# Altium PCB PCB1.PcbDoc
Units mil, origin at the board's own origin, x right, y up, seen from the top; angles counter-clockwise.
Board outline 3898.32 x 3898.32 mil, 2 copper layers (Top Layer, Bottom Layer); 61 components, 48 nets, 233 pads, 56 vias.
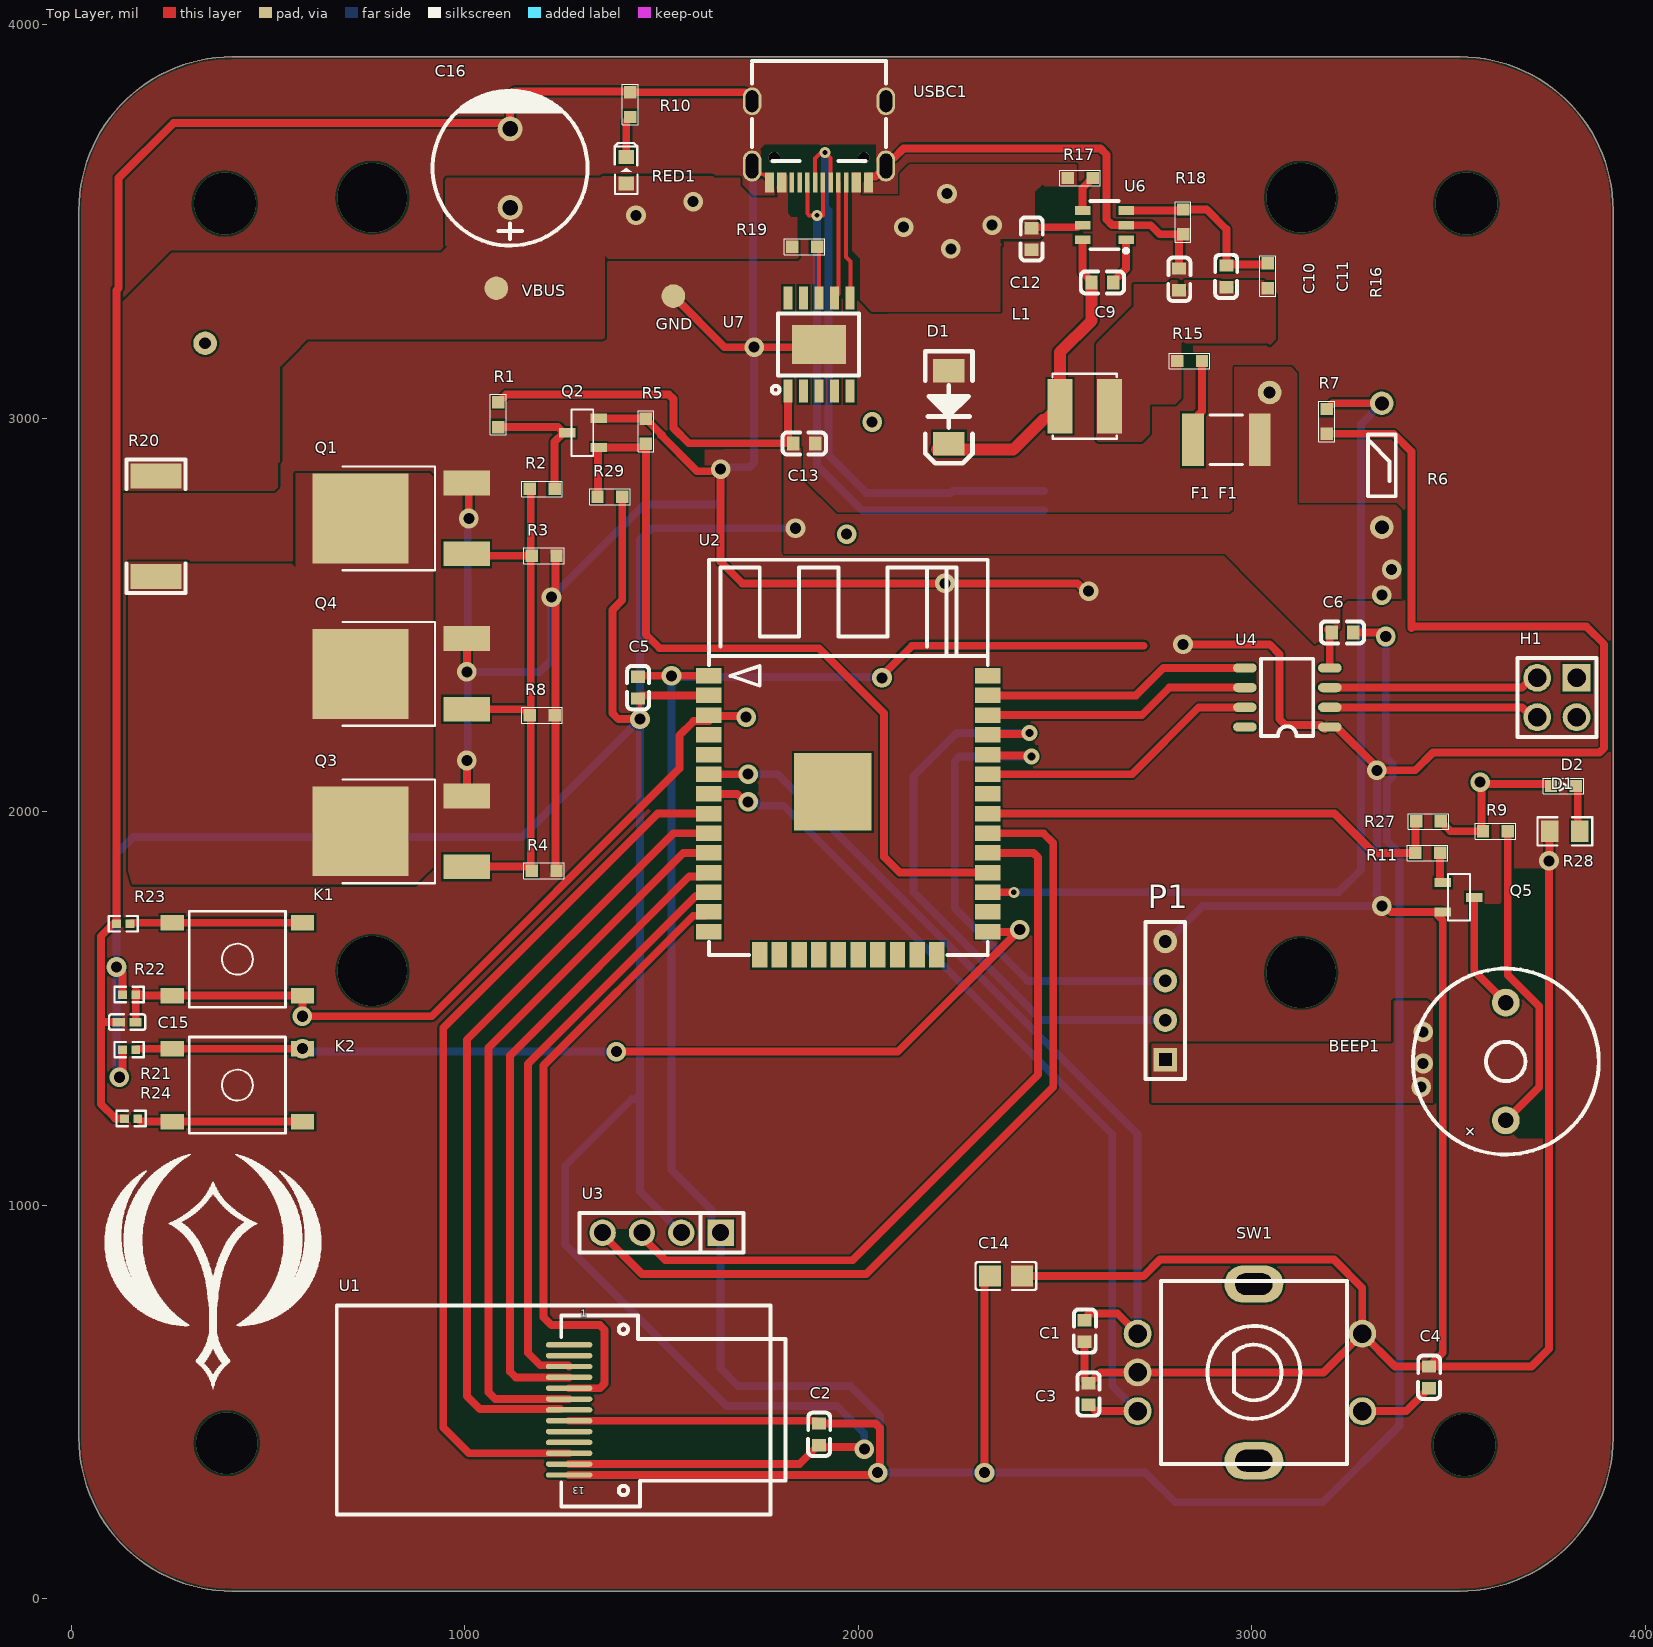
[diagram p0: Top Layer view]
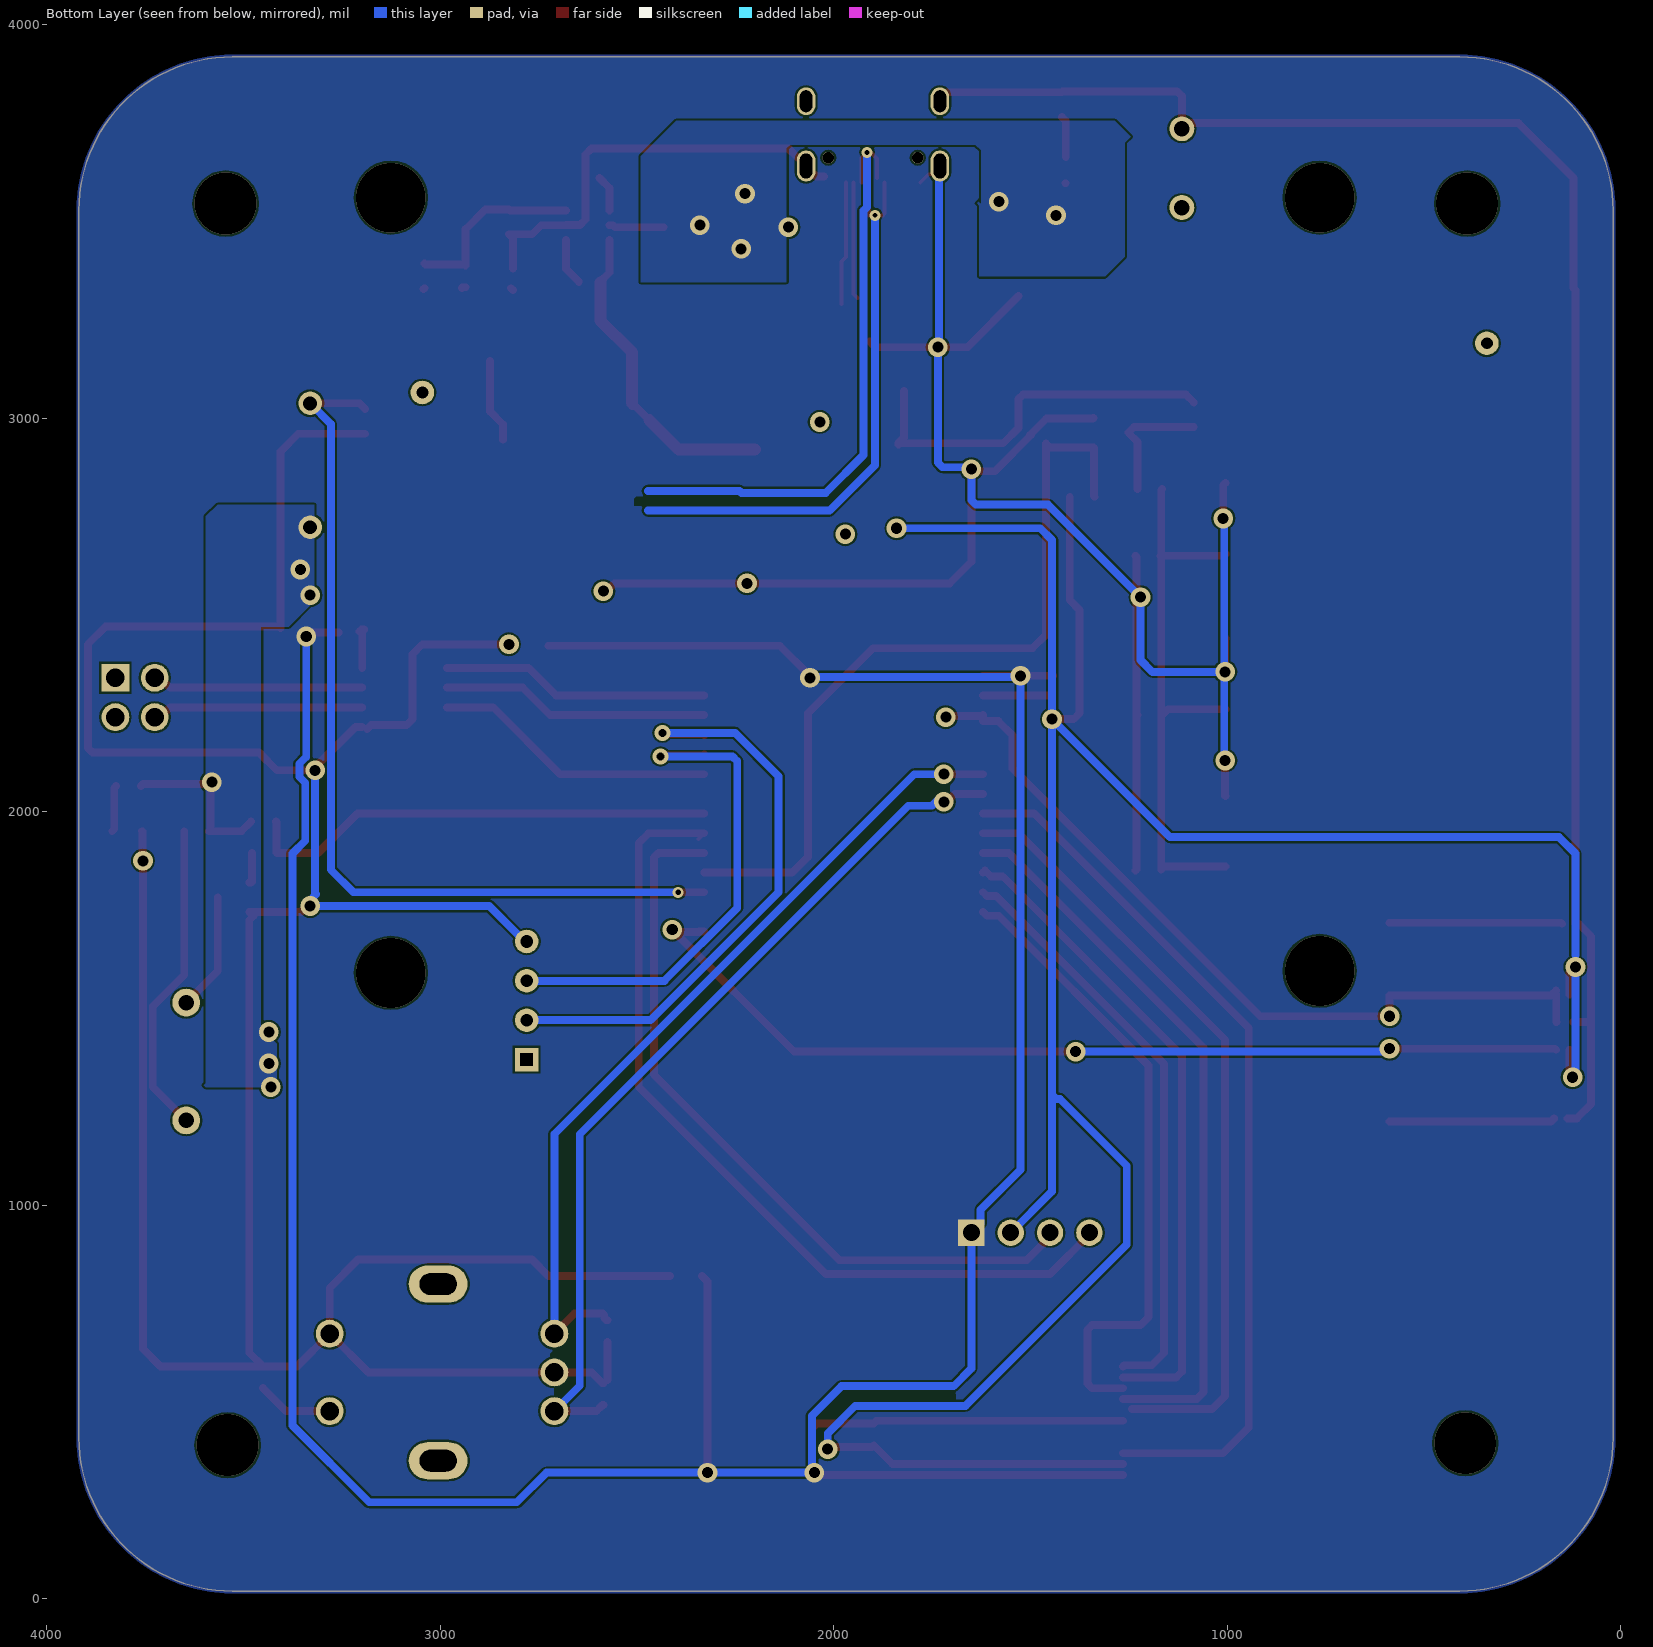
[diagram p1: Bottom Layer view, seen from below]

## Layer stack, top to bottom
Top Solder: solder mask 0.4, Solder Resist, Dk 3.5
Top Layer: signal copper 1.4
Dielectric 1: dielectric 12.6, FR-4, Dk 4.8
Bottom Layer: signal copper 1.4
Bottom Solder: solder mask 0.4, Solder Resist, Dk 3.5

## Board outline
19.35,409.18 19.35,3527.83 cw(c409.18,3527.83) 409.18,3917.66 3527.83,3917.66 cw(c3527.83,3527.83) 3917.66,3527.83 3917.66,409.18 cw(c3527.83,409.18) 3527.83,19.35 409.18,19.35 cw(c409.18,409.18)

## Design rules (kind name [scope] priority, off if disabled: settings)
Clearance [All] p1: gap=5 ignorepadtopadclearanceinfootprint=TRUE
PolygonConnect [All] p1: connectstyle=Direct reliefconductorwidth=10 reliefentries=4 polygonreliefangle="90 Angle" airgapwidth=10
RoutingVias [All] p1: holewidth=28 width=50 viastyle="Through Hole" minholewidth=28 minwidth=50 maxholewidth=28 maxwidth=50
SolderMaskExpansion [All] p1: expansion=4
Width [All] p1: maxlimit=100 minlimit=10 preferedwidth=20
30 further rules are at their usual default settings.

## Components (designator, comment, footprint, x,y, rotation, side; value= is the part's Value field where it differs from the comment)
BEEP1 "BEEP-9.5X5.5" BUZ-TH_BD12.0-P7.60-D0.6-FD 3645,1365 r90 top
C1 "100nf" C0603 2575,680 r90 top
C2 "100nf" C0603 1900,417.56 r90 top
C3 "100nf" C0603 2585,520 r270 top
C4 "100nf" C0603 3450,562.56 r90 top
C5 "100NF" C0603 1440,2315 r90 top
C6 "100nf" C0603 3230,2455 r180 top
C9 "1UF" C0603 2620,3345 r0 top
C10 "100UF" C0603 2815,3352.56 r90 top
C11 "440P~660P" C0603 2935,3360 r270 top
C12 "10UF" C0603 2440,3455 r90 top
C13 "1uF" C0603 1862.44,2935 r180 top
C14 "C0805" C0805 2375,820 r180 top
C15 "C0402" C0402 141.93,1465 r0 top value=0.1UF
C16 "CAP+_47UF_FIRE" CAP-TH_BD10.0-P5.00-D1.0-FD 1115,3635 r90 top
D1 "SMAJ5.0CA" DO-214 2230,3120 r270 top
D2 "LED_RED_0603_FIRE" LED_RED_0603_FIRE 3760,2065 r0 top value=RED
F1 "FUSE500MA" C1812 2935,2945 r0 top value=FUSE500ma
H1 "A2541WV-2X2P" HDR-TH_4P-P2.54-V-R2-C2-S2.54_A2541WV-2X2P 3775,2290 r180 top
K1 "KEY" SW6.2/6.2-SMD 421.93,1625 r0 top
K2 "KEY" SW6.2/6.2-SMD 421.93,1305 r180 top
L1 "6.8uH" IND-SMD_L4.0-W4.0 2575,3030 r0 top
P1 "2.54-1*4P_JX" 2.54-1*4P_TIGHT_JX 2780,1520 r90 top
Q1 "NCE3050K" TO-252-2_L6.6-W6.1-P4.57-LS10.1-TL-CW 869.81,2745 r180 top
Q2 "S8050" SOT-23 1340,2925 r90 top
Q3 "NCE3050K" TO-252-2_L6.6-W6.1-P4.57-LS10.1-TL-CW 869.81,1950 r180 top
Q4 "NCE3050K/NC" TO-252-2_L6.6-W6.1-P4.57-LS10.1-TL-CW 869.81,2350 r180 top
Q5 "S8050" SOT-23 3485,1819.8 r270 top
R1 "R0603" R_0603 1085,2977.01 r90 top value=3K
R2 "R0603" R_0603 1227.99,2820 r180 top value=100R
R3 "R0603" R_0603 1232.99,2650 r180 top value=100K
R4 "R0603" R_0603 1232.99,1850 r180 top value=100K
R5 "R0603" R_0603 1460,2997.99 r270 top value=10K
R6 "100kΩ/nc" RES-TH_BD1.8-L4.0-P8.00-D0.5 3330,2880 r90 top
R7 "R0603" R_0603 3190,3022.99 r270 top value=100K/nc
R8 "R0603" R_0603 1227.99,2245 r180 top value=10K/NC
R9 "R0603" R_0603 3650,1950 r180 top value=100R
R10 "R0603" R_0603 1420,3765 r90 top value=500R
R11 "R0603" R_0603 3415,1895 r0 top value=10K
R15 "R0603" R_0603 2810,3145 r0 top value=1K
R16 "R0603" R_0603 3040,3392.99 r270 top value=3.3K
R17 "R0603" R_0603 2595,3610 r180 top value=1M
R18 "R0603" R_0603 2825,3467.01 r90 top value=1K
R19 "R0603" R_0603 1895,3435 r180 top value=1K
R20 "加热板" R2512 215,2725 r90 top value=0.01Ω
R21 "R0402" R0402 146.93,1395 r180 top
R22 "R0402" R0402 146.93,1535 r180 top
R23 "R0402" R0402 131.93,1715 r0 top
R24 "R0402" R0402 151.93,1220 r0 top
R27 "R0603" R_0603 3417.01,1975 r0 top value=0R/NC
R28 "R0603" R0805 3795,1950 r180 top value=50K
R29 "R0603" R_0603 1337.01,2800 r0 top value=0R/NC
RED1 "LED-0603_R" LED0603_RED 1410,3630 r90 top
SW1 "EC11" SW-TH_5P-L11.8-W12.0-P2.50-LS14.5 2995,575 r270 top
U1 "0.96 TFT" "0.96 LCD" 1265,479.76 r180 top
U2 "ESP32-WROOM-32" WIFIM-SMD_ESP-32S 1974.37,1990.55 r270 top
U3 "OLED" HDR-TH_4P-P2.54-V-M 1500,930 r180 top
U4 "MAX6675" SOIC-8_L5.0-W4.0-P1.27-LS6.0-BL 3090,2290 r90 top
U6 "ME3116" SOT-23-6_L2.9-W1.6-P0.95-LS2.8-BR 2625,3490 r0 top
U7 "CH224K" ESSOP10-EP 1900,3186.89 r90 top
USBC1 "TYPE-C-31-M-12" USB-C_SMD-TYPE-C-31-M-12 1899.92,3701.68 r180 top

## Footprints (in the part's own frame and the unit in brackets; to place one, negate y for a bottom-side part, rotate by r counter-clockwise, add the part's x,y. Pads: shape width x height; smd on the part's side, far side on the other; paste and mask are expansions set on the pad)
"0.96 LCD" [mm]
  oval 3x0.35 smd: 1(0,-4.2) 2(0,-3.5) 3(0,-2.8) 4(0,-2.1) 5(0,-1.4) 6(0,-0.7) 7(0,0) 8(0,0.7) 9(0,1.4) 10(0,2.1) 11(0,2.8) 12(0,3.5) 13(0,4.2)
  silkscreen extent -13.97,-6.75 15,6.75
2.54-1*4P_TIGHT_JX [mm]
  rect 1.52x1.52 hole 0.81 square: 1(-3.81,0)
  round 1.52 hole 0.81: 2(-1.27,0) 3(1.27,0) 4(3.81,0)
  silkscreen extent -5.08,-1.27 5.08,1.27
BUZ-TH_BD12.0-P7.60-D0.6-FD [mm]
  round 1.8 hole 1: 1(-3.8,0) 2(3.8,0)
  silkscreen extent -6,-6 6,6
C0402 [mm]
  rect 0.79x0.54 smd: 1(-0.545,0) 2(0.545,0)
  silkscreen extent -1.17,-0.5 1.17,0.5
C0603 [mm]
  rect 0.8x0.9 smd: 1(0.7,0) 2(-0.7,0)
  silkscreen extent -1.4,-0.72 1.4,0.7
C0805 [mm]
  rect 1.41x1.35 smd: 1(-1.03,0) 2(1.03,0)
  silkscreen extent -1.96,-0.9 1.96,0.9
C1812 [mm]
  rect 1.4x3.4 smd: 1(-2.15,0) 2(2.15,0)
  silkscreen extent -1.05,-1.6 1.05,1.6
CAP-TH_BD10.0-P5.00-D1.0-FD [mm]
  round 1.6 hole 1: 1(-2.54,0) 2(2.54,0)
  silkscreen extent -5,-5 5.08,5
DO-214 [mil]
  rect 60x80 smd: 1(0,0) 2(185,0)
  silkscreen extent -50,-60 235,60
ESSOP10-EP [mm]
  rect 2.5x3.5 smd: 0(0,0)
  rect 1.5x0.6 smd: 1(-3,2) 2(-3,1) 3(-3,0) 4(-3,-1) 5(-3,-2) 6(3,-2) 7(3,-1) 8(3,0) 9(3,1) 10(3,2)
  silkscreen extent -3.17,-2.57 2,3.05
HDR-TH_4P-P2.54-V-M [mm]
  rect 1.7x1.7 hole 1.1: 1(-3.81,0)
  round 1.7 hole 1.1: 2(-1.27,0) 3(1.27,0) 4(3.81,0)
  silkscreen extent -5.29,-1.27 5.29,1.27
HDR-TH_4P-P2.54-V-R2-C2-S2.54_A2541WV-2X2P [mm]
  rect 1.8x1.8 hole 1.2: 1(-1.27,-1.27)
  round 1.8 hole 1.2: 2(-1.27,1.27) 3(1.27,-1.27) 4(1.27,1.27)
  silkscreen extent -2.54,-2.54 2.54,2.54
IND-SMD_L4.0-W4.0 [mm]
  rect 1.6x3.5 smd: 1(-1.6,0) 2(1.6,0)
  silkscreen extent -2.08,-2.1 2.08,2.1
LED0603_RED [mm]
  rect 0.9x1 smd: 1(-0.85,0) 2(0.85,0)
  silkscreen extent -1.54,-0.73 1.75,0.73
LED_RED_0603_FIRE [mm]
  rect 0.8x0.8 smd: A(0,0) K(1.6,0)
  silkscreen extent -0.51,-0.51 2.11,0.51
R0402 [mm]
  rect 0.566x0.54 smd: 1(-0.433,0) 2(0.433,0)
  silkscreen extent -0.94,-0.5 0.94,0.5
R0805 [mil]
  rect 44.59x54.21 smd: 1(-38.04,0) 2(38.04,0)
  silkscreen extent -69,-36 69,36
R2512 [mm]
  rect 1.6x3.3 smd: 1(-3.25,0) 2(3.25,0)
  silkscreen extent -4.3,-1.9 4.3,1.9
R_0603 [mm]
  rect 0.8x0.8 smd: 1(0,0) 2(1.6,0)
  silkscreen extent -0.51,-0.51 2.11,0.51
RES-TH_BD1.8-L4.0-P8.00-D0.5 [mil]
  round 60 hole 35.43: 1(-157.48,0) 2(157.48,0)
  silkscreen extent -79,-35 79,35
SOIC-8_L5.0-W4.0-P1.27-LS6.0-BL [mm]
  oval 0.6x1.52 smd: 1(-1.905,-2.74) 2(-0.635,-2.74) 3(0.635,-2.74) 4(1.905,-2.74) 5(1.905,2.74) 6(0.635,2.74) 7(-0.635,2.74) 8(-1.905,2.74)
  silkscreen extent -2.49,-1.67 2.5,1.7
SOT-23 [mm]
  rect 0.6x1.05 smd: 1(0,0) 2(1.9,0) 3(0.965,2.032)
  silkscreen extent -0.55,0.35 2.45,1.75
SOT-23-6_L2.9-W1.6-P0.95-LS2.8-BR [mm]
  rect 1x0.55 smd: 1(1.4,-0.95) 2(1.4,0) 3(1.4,0.95) 4(-1.4,0.95) 5(-1.4,0) 6(-1.4,-0.95)
  silkscreen extent -0.9,-1.78 1.52,1.55
SW6.2/6.2-SMD [mm]
  rect 1.5x1 smd: 1(-4.2,2.35) 2(4.2,2.35) 3(-4.2,-2.35) 4(4.2,-2.35)
  silkscreen extent -3.1,-3.1 3.1,3.1
SW-TH_5P-L11.8-W12.0-P2.50-LS14.5 [mm]
  round 1.8 hole 1.2: 1(-2.5,-7.25) 2(0,-7.25) 3(2.5,-7.25) 4(-2.5,7.25) 5(2.5,7.25)
  oval 2.4x3.8 hole 1.4 slot 2.4 at 90 deg: 7(-5.7,0.25) 8(5.7,0.25)
  silkscreen extent -5.9,-5.75 5.9,6.25
TO-252-2_L6.6-W6.1-P4.57-LS10.1-TL-CW [mm]
  rect 3x1.6 smd: 1(-3.424,2.285) 3(-3.424,-2.285)
  rect 6.2x5.8 smd: 2(3.424,0)
  silkscreen extent -1.38,-3.35 4.58,3.35
USB-C_SMD-TYPE-C-31-M-12 [mm]
  oval 1.2x1.8 hole 0.8 slot 1.4 at 90 deg: 0(-4.32,-2.624) 0(4.32,-2.624)
  oval 1.2x2 hole 0.8 slot 1.6 at 90 deg: 0(-4.32,1.556) 0(4.32,1.556)
  rect 0.3x1.3 smd: A1(-3.35,2.623) A4(-2.55,2.623) A5(-1.25,2.623) A6(-0.25,2.623) A7(0.25,2.623) A8(1.25,2.624) A9(2.55,2.623) A12(3.35,2.623) B1(3.05,2.623) B4(2.25,2.623) B5(1.75,2.623) B6(0.75,2.623) B7(-0.75,2.623) B8(-1.75,2.624) B9(-2.25,2.623) B12(-3.05,2.623)
  round 0.75 hole 0.75 unplated: ""(-2.89,1.026) ""(2.89,1.026)
  silkscreen extent -4.32,-5.23 4.32,1.22
WIFIM-SMD_ESP-32S [mm]
  rect 1x1.65 smd: 1(-9.005,-9) 2(-7.735,-9) 3(-6.465,-9) 4(-5.195,-9) 5(-3.925,-9) 6(-2.655,-9) 7(-1.385,-9) 8(-0.115,-9) 9(1.155,-9) 10(2.425,-9) 11(3.695,-9) 12(4.965,-9) 13(6.235,-9) 14(7.505,-9) 25(7.505,9) 26(6.235,9) 27(4.965,9) 28(3.695,9) 29(2.425,9) 30(1.155,9) 31(-0.115,9) 32(-1.385,9) 33(-2.655,9) 34(-3.925,9) 35(-5.195,9) 36(-6.465,9) 37(-7.735,9) 38(-9.005,9)
  rect 1.65x1 smd: 15(9.005,-5.715) 16(9.005,-4.445) 17(9.005,-3.175) 18(9.005,-1.905) 19(9.005,-0.635) 20(9.005,0.635) 21(9.005,1.905) 22(9.005,3.175) 23(9.005,4.445) 24(9.005,5.715)
  rect 5x5 smd: 39(-1.51,-1)
  silkscreen extent -16.5,-9 9,9

## Part data
C1 C2 C3 C4 C5 C6 C9 C10 C11 C12 C13: library part C0603, BOM_Manufacturer="Samsung Electro-Mechanics", BOM_Manufacturer Part=10uF, BOM_Supplier=LCSC, BOM_Supplier Part=C15415, Contributor=LCSC, nameAlias=Value, spicePre=C, spiceSymbolName=10UF
C14: "Capacitor"
C16: "电解电容", PCB DECAL=CAP+_47UF_FIRE
D1: "500V  400W 稳压管", PCB DECAL=DO-214
D2: "red,0805", PCB DECAL=LED_RED_0603_FIRE
F1: "FUSE500ma", Assembly=SMD, Manufacture 1 P/N=FUSE500ma, PCB DECAL=C1812, Protel.FootprintDescription="Chip Capacitor, 2-Leads, Body 4.6x3.2mm, IP"
H1: library part 2X2P, BOM_JLCPCB Part Class="Extended Part", BOM_Manufacturer="Changjiang Connectors", BOM_Manufacturer Part=A2541WV-2x2P, BOM_Supplier=LCSC, BOM_Supplier Part=C225517, Contributor=LCSC, spicePre=H, spiceSymbolName=A2541WV-2X2P
L1: BOM_Manufacturer=LCSC, BOM_Manufacturer Part=SM1054-6R8MT, BOM_Supplier=LCSC, BOM_Supplier Part=C11034, nameAlias=Value, spicePre=L, spiceSymbolName=6.8uH
Q1 Q3: BOM_JLCPCB Part Class="Extended Part", BOM_Manufacturer=Ncepower, BOM_Manufacturer Part=NCE3050K, BOM_Supplier=LCSC, BOM_Supplier Part=C127863, spicePre=Q, spiceSymbolName=NCE3050K
Q2 Q5: "NPN", Manufacturer #2=8050, PCB DECAL=SOT-23
Q4: library part NCE3050K, BOM_JLCPCB Part Class="Extended Part", BOM_Manufacturer=Ncepower, BOM_Manufacturer Part=NCE3050K, BOM_Supplier=LCSC, BOM_Supplier Part=C127863, spicePre=Q, spiceSymbolName=NCE3050K
R6: library part "NTC 100kΩ", BOM_JLCPCB Part Class="Extended Part", BOM_Manufacturer=Shiheng, BOM_Manufacturer Part=MF58-104J3950F, BOM_Supplier=LCSC, BOM_Supplier Part=C84686, nameAlias=Value, spicePre=R, spiceSymbolName=MF58-104J3950F
R20: library part R2501, "R2501", BOM_JLCPCB SMD=Yes, BOM_Manufacturer=SUP, BOM_Manufacturer Part=MRF6432(2512)LR010JTS, BOM_Supplier=LCSC, BOM_Supplier Part=C76272, image=http://image.lceda.cn/szlcsc/C76272.jpg, SMT Type=Extend, spicePre=R, spiceSymbolName=MRF6432(2512)LR010JTS
RED1: BOM_Manufacturer=EVERLIGHT(Ì¨Í, BOM_Manufacturer Part=19-217/R6C-AL1M2VY/3T, BOM_Supplier=LCSC, BOM_Supplier Part=C72044, Contributor=LCEDA_01, spicePre=L, spiceSymbolName=LED-0603_R
SW1: BOM_JLCPCB Part Class="Extended Part", BOM_Manufacturer=BOURNS, BOM_Manufacturer Part=PEC11L-4115F-S0020, BOM_Supplier=LCSC, BOM_Supplier Part=C143799, Contributor=LCSC, spicePre=S, spiceSymbolName=PEC11L-4115F-S0020
U2: BOM_JLCPCB Part Class="Extended Part", BOM_Manufacturer="Espressif Systems", BOM_Manufacturer Part=ESP32-WROOM-32, BOM_Supplier=LCSC, BOM_Supplier Part=C82899, Contributor=LCSC, spicePre=U, spiceSymbolName=ESP32-WROOM-32
U3: library part "OLED module", BOM_Manufacturer=kinghelm(½ðº, BOM_Manufacturer Part=KH-2.54PH180-1X4P-L11.5, BOM_Supplier=LCSC, BOM_Supplier Part=C2905435, Contributor=LCSC, spicePre=H, spiceSymbolName=KH-2.54PH180-1X4P-L11.5
U4: BOM_LCSC Assembly=Yes, BOM_Manufacturer=MAXIM, BOM_Manufacturer Part=MAX6675ISA+T, Package Display=No, BOM_Supplier=LCSC, BOM_Supplier Part=C16030, image=//image.lceda.cn/szlcsc/C16030.jpg, SMT Type=Extend, spicePre=U, spiceSymbolName=MAX6675ISA+T
U6: BOM_JLCPCB Part Class="Extended Part", BOM_Manufacturer=MICRONE, BOM_Manufacturer Part=ME3116, BOM_Supplier=LCSC, BOM_Supplier Part=C97643, spicePre=U, spiceSymbolName=ME3116
U7: BOM_Manufacturer=南京, Contributor=hans_1024, spicePre=U, spiceSymbolName=CH224K
USBC1: BOM_Manufacturer="Rectangular Connectors - Contacts", BOM_Manufacturer Part=TYPE-C-31-M-12, BOM_Supplier=LCSC, BOM_Supplier Part=C165948, Contributor=LCSC, spicePre=U, spiceSymbolName=TYPE-C-31-M-12
BEEP1: PCB DECAL=BEEP-9.5X5.5
C15: PCB DECAL=CAP_0603_FIRE
K1 K2: Manufacturer #1 PN=KEY, PCB DECAL=SW6.2/6.2-SMD
P1: BOM_Supplier=LCSC, BOM_Supplier Part=C115245, spicePre=P, spiceSymbolName=2.54-1*4P_JX
R1 R2 R3 R4 R5 R7 R8 R9 R10 R11 R15 R16 R17 R18 R19 R27 R28 R29: PCB DECAL=R_0603
U1: Contributor=FJ956391150, spicePre=U, spiceSymbolName="0.96 TFT"

## Free pads (board coordinates)
  round 60 hole 30: 2(3045,3065) 3(340,3190)
  round 60 smd: 4(1080,3330) 4(1530,3310)

## Via types
v1: diameter 50, hole 28, Top Layer to Bottom Layer, 43 vias
v2: diameter 177.17, hole 177.17, Top Layer to Bottom Layer, 4 vias
v3: diameter 157.48, hole 157.48, Top Layer to Bottom Layer, 4 vias
v4: diameter 28, hole 12, Top Layer to Bottom Layer, 2 vias
v5: diameter 40, hole 20, Top Layer to Bottom Layer, 2 vias
v6: diameter 28, hole 14, Top Layer to Bottom Layer, 1 vias

## Nets (pads, with @x,y where several pads share a name; then routed paths per layer and width w, separated by ;. In a path a pad name is that pad's centre, name@x,y a point inside that pad or via, vN(x,y) a via of type N, cw(c..) or ccw(c..) an arc to the next point about the centre after c; other vN are vias at no path point)
3.3V: C2.2 C5.2 C6.1 C13.1 D2.A F1.2 P1.1 pad.2 R1.2 R6.1 R9.2 R21.2 R22.2 R27.2 R29.2 U1.12 U2.2 U3.2 U4.4 U7.1 | length 9035
  Top Layer w10: C5.2@1444.82,2282.63 C5.2@1440,2277.81 ; v1(1445,2235) 1445,2272.81 C5.2@1440,2277.81 ; C5.2@1447.63,2295.07 C5.2 C5.2@1440,2277.81
  Top Layer w20: v1(115,1605) 129.89,1590.11 R22.2 ; v1(121.93,1325) 121.93,1333.12 129.89,1341.08 R21.2 ; R1.2 1105,3060 1518.28,3060 1530,3048.28 1530,2975 1569.02,2935.98 C13.1@1834.89,2935.98 ; U1.12 1850,341.97 1898.03,390 1903.03,385 2010,385 v1(2015,380) ; R29.2 1400,2537.5 1375,2512.5 1375,2250 1390,2235 v1(1445,2235) ; C5.2@1447.63,2295.07 U2.2 ; U7.1 1821.26,2950.59 1834.89,2936.97 C13.1@1834.89,2935.98 ; C13.1@1834.89,2933.03 C13.1 C13.1@1834.89,2935.98 ; P1.1 P1.1@2785,1365 ; C6.1@3192.62,2463.19 3199.25,2463.19 3205,2457.44 3203.62,2457.44 3197.87,2451.7 U4.4 ; v1@3430,1365 v1(3435,1360) ; R27.2 3505,1950 R9.2 3583.5,1953.5 v1@3583.5,2071.5 ; v1(3580,2075) v1@3583.5,2071.5 ; D2.A 3755,2070 3585,2070 v1@3583.5,2071.5
  Bottom Layer w20: v1(115,1605) 115,1331.93 v1(121.93,1325) ; 115,1635 115,1893.28 156.72,1935 1145,1935 v1(1445,2235) ; U3.2 1445,1035 1445,1280 ; v1(1840,2720) 1475,2720 1445,2690 v1(1445,2235) ; v1(2015,380) 2015,420 1945,490 1665,490 1255,900 1255,1100 1425,1270 1435,1270 1445,1280 ; 1445,1280 v1(1445,2235)
  other v1: 3430,1300 3435,1440 3330,2550 3355,2615
GND: C1.2 C3.2 C4.1 C10.1 C12.2 C13.2 C14.1 C15.1 C16.2 D1.1 P1.4 pad.4@1530,3310 Q1.3 Q2.2 Q3.3 Q4.3 Q5.2 R3.1 R4.1 R5.1 R7.2 R8.1 R10.2 R18.1 R23.1 R24.1 R28.2 SW1.2 SW1.4 U4.1 U6.2 U7.0 USBC1.0 USBC1.A1 USBC1.A12 USBC1.B1 USBC1.B12 | length 19771.9
  Top Layer w10: USBC1.0@1742.43,3619.47 1758.78,3619.47 USBC1.B1
  Top Layer w20: R23.1@106.93,1715 75,1683.07 75,1466.93 75.05,1466.89 ; R23.1 114.89,3324.89 120,3330 120,3610 260,3750 1100,3750 C16.2 1115,3818.28 1126.72,3830 1417.99,3830 R10.2 1711.29,3827.99 1729.84,3809.44 USBC1.0@1729.84,3805 ; C15.1 115.55,1465 114.92,1465.63 76.3,1465.63 75.05,1466.89 ; R24.1 134.39,1220 133.76,1220.63 111.3,1220.63 75.05,1256.89 75.05,1466.89 ; Q3.3 1005,2040.35 v1(1005,2130) ; Q4.3 1005,2439.56 v1(1005,2355) ; Q1.3 1010,2829.56 v1(1010,2745) ; R4.1 1230.49,1852.5 1230.49,2242.5 R8.1 1230.49,2247.5 1230.49,2647.5 R3.1 ; Q2.2 1340.91,2998.9 1459.09,2998.9 R5.1 1500.67,2957.32 1497.68,2957.32 1590,2865 v1@1650,2865 ; pad.4@1530,3310 1660,3180 v1(1735,3180) 1893.11,3180 U7.0 U7.0@1908.11,3195 ; v1(1650,2870) v1@1650,2865 ; USBC1.0@1729.84,3640.43 1729.84,3632.06 USBC1.0@1742.43,3619.47 ; USBC1.B12@2024.1,3614 2043.56,3614 2049.04,3619.47 2057.41,3619.47 2070,3632.06 2070,3640.43 2070,3648.81 2082.59,3661.39 2090.96,3661.39 2114.57,3685 2615,3685 2630,3670 2630,3505 2644.17,3490.83 2679.29,3490.83 U6.2 2742.62,3490 2765.61,3467.01 R18.1 2815,3457.01 C10.1 ; USBC1.0@2067.59,3805 2070,3802.59 USBC1.0@2070,3805 ; C14.1 2724.92,820 2766.57,861.65 3208.35,861.65 3280.43,789.57 SW1.4 ; C3.2@2575,555.59 C1.2 ; C3.2 2586.97,547.56 2614.41,575 SW1.2 3182.01,575 SW1.4 ; v1(2585,2560) 2576.88,2560 2556.88,2580 v1(2220,2580) 1705,2580 1650,2635 v1@1650,2865 ; v1@2823.27,2423.27 v1(2825,2425) 3045,2425 3070,2400 3070,2235 3085,2220 3175,2220 U4.1@3185,2210 ; R7.2 3360,2960 3405,2915 3405,2466.72 3408.28,2470 3850,2470 3895,2425 3895,2161.72 3883.28,2150 3460,2150 3415,2105 v1(3317.52,2105) 3317.52,2112.48 3215,2215 U4.1 ; v1(3330,1760) 3338.12,1760 3353.12,1745 Q5.2@3476.14,1745 ; Q5.2 Q5.2@3476.14,1745 ; R28.2 3755.98,1949.02 3755.98,1875.98 v1(3755,1875) 3755,635 3710.11,590.11 C4.1 ; SW1.4 3363.74,590.11 C4.1 ; C4.1 3485,625.11 3485,1723.66 3474.33,1734.33 3474.33,1743.19 Q5.2@3476.14,1745
  Bottom Layer w20: v1(1005,2130) 1007.5,2132.5 v1@1007.5,2355 ; v1(1005,2355) v1@1007.5,2355 ; v1(1010,2745) 1007.5,2742.5 v1@1007.5,2355 ; USBC1.0@1729.84,3640.43 1732.42,3637.86 1732.42,3182.58 v1(1735,3180) 1735,2886.72 1723.28,2875 1655,2875 v1(1650,2870) 1650,2791.72 1638.28,2780 1455,2780 v1(1220,2545) 1220,2385 1190,2355 v1@1007.5,2355 ; P1.4 2785,1670 2875,1760 v1(3330,1760) 3330,1775 3315,1790 3317.52,1792.52 v1(3317.52,2105)
NetBEEP1_1: BEEP1.1 R9.1 | length 803.2
  Top Layer w20: BEEP1.1 3645.39,1215.39 3730,1300 3730,1505 3650,1585 R9.1
NetBEEP1_2: BEEP1.2 Q5.3 | length 299.9
  Top Layer w20: Q5.3 3565,1595 BEEP1.2@3645,1515
NetC1_1: C1.1 SW1.1 U2.6 | length 2143.1
  Top Layer w20: U2.6 1620.08,2095.04 v1(1720,2095) v1(1720,2095) ; C1.1 2576.97,707.56 2582.72,713.3 2582.72,721 2586.72,725 2657.99,725 SW1.1
  Bottom Layer w20: v1(1720,2095) 1795,2095 2709.57,1180.43 SW1.1
NetC3_1: C3.1 SW1.3 U2.7 | length 2251.6
  Top Layer w20: U2.7 1691.81,2045.07 1711.88,2025 v1(1720,2025) ; C3.1 2586.97,492.44 2602.84,476.57 2696.57,476.57 2700,480 2703.43,476.57 SW1.3
  Bottom Layer w20: v1(1720,2025) 1725,2030 1735,2030 1750,2015 1810,2015 2645,1180 2645,541.14 SW1.3
NetC4_2: C4.2 SW1.5 | length 193.8
  Top Layer w20: SW1.5 3391.57,476.57 C4.2
NetC9_1: C9.1 U6.1 | length 121.1
  Top Layer w20: C9.1 2647.56,3346.97 2680.12,3379.53 U6.1
NetC9_2: C9.2 D1.2 L1.1 U6.6 | length 826.4
  Top Layer w20: 2468.39,2994.89 2512.01,3038.5 L1.1 ; U6.6 2569.88,3369.53 2592.44,3346.97 C9.2
  Top Layer w30: D1.2@2200,2920 2393.5,2920 2468.39,2994.89 ; L1.1@2512.01,3038.5 2512.01,3167.01 2592.44,3247.44 C9.2
NetC10_2: C10.2 C11.1 L1.2 R15.1 R16.2 | length 21.6
  Top Layer w20: C10.2 C10.2@2820,3330 ; C11.1 2942.56,3332.44 C11.1@2945,3330 ; R16.2 R16.2@3042.5,3327.5
NetC11_2: C11.2 R16.1 R18.2 U6.3 | length 476.4
  Top Layer w20: U6.3 2822.4,3527.4 R18.2 2885,3530 2935,3480 C11.2 2937.72,3390.27 3037.28,3390.27 R16.1
NetC15_2: C15.2 K1.3 K1.4 R22.1 U2.3 | length 2056.7
  Top Layer w20: C15.2 163.68,1465.29 163.68,1534.71 R22.1 ; R22.1@163.97,1545 164.48,1545 177,1532.48 K1.3 K1.4 587.11,1532.3 587.11,1480.18 v1(586.93,1480) 915.7,1480 1545,2109.3 1545,2193.41 1581.35,2229.76 1620.04,2229.76 U2.3 1622.58,2242.54 1712.46,2242.54 v1(1715,2240)
NetD2_K: D2.K R28.1 | length 119.2
  Top Layer w20: D2.K 3828.02,2059.97 3828.02,1955.03 R28.1
NetF1_1: F1.1 R15.2 | length 213.5
  Top Layer w20: F1.1@2840.35,2945 2840.35,2984.37 2872.99,3017.01 R15.2
NetH1_3: H1.3 U4.3 | length 537.5
  Top Layer w20: U4.3 3686.24,2315 3711.24,2340 H1.3
NetH1_4: H1.4 U4.2 | length 537.5
  Top Layer w20: U4.2 3686.24,2265 3711.24,2240 H1.4
NetJ2_1: Q1.2 Q3.2 Q4.2 R20.1
NetJ6_1: R11.1 R27.1 U2.31 | length 1208.6
  Top Layer w20: U2.31 3209.92,1995.08 3310,1895 R11.1 3416,1896 3416,1974 R27.1
NetK1_1: K1.1 K1.2 R23.2 | length 439.4
  Top Layer w20: R23.2 149.48,1715 152,1717.52 K1.1 K1.2
NetK2_1: K2.1 K2.2 R24.2 | length 421.4
  Top Layer w20: R24.2 169.48,1220 177,1212.48 K2.2 K2.1
NetK2_3: K2.3 K2.4 R21.1 U2.25 | length 2468.6
  Top Layer w20: R21.1 164.48,1395 167,1397.52 K2.4 v1(587.29,1397.52) ; v1(1385,1390) 2100,1390 v1@2404.26,1694.26 ; U2.25 2341.49,1695.08 2342.3,1694.26 v1@2404.26,1694.26 ; v1(2410,1700) v1@2404.26,1694.26
  Bottom Layer w20: v1(587.29,1397.52) 594.81,1390 v1(1385,1390) ; v1@2400,1710 v1(2410,1700)
NetP1_2: P1.2 U2.35 | length 1518.5
  Top Layer w20: U2.35 2331.15,2197.54 2432.54,2197.54 v5(2435,2200)
  Bottom Layer w20: v5(2435,2200) 2250,2200 2140,2090 2140,1795 2465,1470 P1.2
NetP1_3: P1.3 U2.34 | length 1303.6
  Top Layer w20: U2.34 2331.23,2142.54 2437.46,2142.54 v5(2440,2140)
  Bottom Layer w20: v5@2436.17,2143.83 v5(2440,2140) 2256.72,2140 2245,2128.28 2245,1755 2430,1570 P1.3
NetQ1_1: Q1.1 Q3.1 Q4.1 R2.2 R3.2 R4.2 R8.2 | length 1460.4
  Top Layer w20: Q3.1 R4.2@1159.96,1860.04 ; Q4.1 1149.96,2260.04 R8.2 ; Q1.1 1009.64,2650 R3.2@1167.5,2650 ; R2.2 1167.5,2817.5 R3.2@1167.5,2650 ; R4.2@1167.5,1852.5 1167.5,2242.5 R8.2 ; R3.2 R3.2@1168.75,2648.75 ; R8.2 1167.5,2247.5 1167.5,2647.5 R3.2@1168.75,2648.75 ; R3.2@1167.5,2650 R3.2@1168.75,2648.75
NetQ2_1: Q2.1 R5.2 R29.1 U2.28 | length 2068.5
  Top Layer w20: R29.1 1338.5,2801.5 1338.5,2923.5 Q2.1 1450,2925 R5.2 1460,2450 1495,2415 1900,2415 2065,2250 2065,1885 2104.92,1845.08 U2.28
NetQ2_3: Q2.3 R1.1 R2.1 | length 324.5
  Top Layer w20: R1.1 1237.13,2977.01 1251.14,2963 1227.99,2939.85 R2.1
NetQ5_1: Q5.1 R11.2 | length 81.1
  Top Layer w20: R11.2 3477.99,1821.61 3479.8,1819.8 Q5.1
NetR6_2: R6.2 R7.1 U2.27 | length 2325.4
  Top Layer w20: U2.27 2328.73,1795.04 v6(2395,1795) v6(2395,1795) ; R7.1 3204.49,3037.48 R6.2
  Bottom Layer w20: v6(2395,1795) 3220,1795 3277.52,1852.52 3277.52,2985 R6.2
NetR10_1: R10.1 RED1.2 | length 105.7
  Top Layer w20: RED1.2 1410,3755 R10.1
NetR17_1: R17.1 U6.4 | length 93
  Top Layer w20: U6.4 2569.88,3584.88 R17.1
NetR19_1: R19.1 U7.8 | length 132.1
  Top Layer w10: R19.1 1900,3430 U7.8
NetU1_3: U1.3 U2.12 | length 1493.8
  Top Layer w20: U1.3 1261.89,593.11 1191.89,593.11 1160,625 1160,1358.41 1586.98,1785.39 1610.36,1785.39 U2.12
NetU1_4: U1.4 U2.11 | length 1661
  Top Layer w20: U1.4 1129.27,562.44 1115,576.72 1115,1380 1570.39,1835.39 1600.39,1835.39 1615,1850 1619.93,1845.07 U2.11
NetU1_5: U1.5 U2.13 | length 1621.3
  Top Layer w20: U1.5 1343.28,534.88 1355,546.6 1355,683.28 1343.28,695 1220,695 1200,715 1200,1355 1580.39,1735.39 1610.36,1735.39 U2.13
NetU1_6: U1.6 U2.10 | length 1852.6
  Top Layer w20: U1.6 1077.38,507.32 1060,524.71 1060,1400 1555.07,1895.07 U2.10
NetU1_7: U1.7 U2.9 | length 1988.7
  Top Layer w20: U1.7@1242.38,481.72 1038.28,481.72 1005,515 1005,1420 1530.07,1945.07 U2.9
NetU1_11: U1.11 U2.8 | length 2262.9
  Top Layer w20: U1.11 1010.47,369.53 945,435 945,1450 1490.07,1995.07 U2.8
NetU2_29: U2.29 U3.3 | length 1925.7
  Top Layer w20: U3.3@1440,930 1445,925 1510,860 1985,860 2456.79,1331.79 2456.79,1883.36 2445.08,1895.08 U2.29
NetU2_30: U2.30 U3.4 | length 2214.8
  Top Layer w10: U2.30 U2.30@2343.38,1930.39
  Top Layer w20: U3.4@1340,935 1347.5,927.5 1450,825 2020,825 2495,1300 2495,1920 2469.92,1945.08 U2.30
NetU2_33: U2.33 U4.7 | length 723.8
  Top Layer w20: U2.33 2695.08,2095.08 2865,2265 U4.7
NetU2_36: U2.36 U4.6 | length 682.4
  Top Layer w20: U2.36 2720.08,2245.08 2790,2315 U4.6
NetU2_37: U2.37 U4.5 | length 682.4
  Top Layer w20: U2.37 2705.08,2295.08 2775,2365 U4.5
NetU7_6: U7.6 USBC1.B8 | length 313
  Top Layer w10: USBC1.B8 1968.82,3409.25 1980,3398.07 U7.6@1980,3290
NetU7_7: U7.7 USBC1.A5 | length 297.5
  Top Layer w10: U7.7 1949.13,3314.76 USBC1.A5
NetUSBC1_A6: USBC1.A6 USBC1.B6 | length 1444.9
  Top Layer w10: USBC1.B6 1870.39,3519.61 1875,3515 v4(1895,3515) 1910,3515 USBC1.A6@1910,3580
  Bottom Layer w20: v4(1895,3515) 1895,2880 2010,2765 2471.91,2765
NetUSBC1_A7: USBC1.A7 USBC1.B7 | length 1530.4
  Top Layer w10: USBC1.A7@1890,3610 1890,3660 1910,3680 v4(1915,3675) 1929.45,3660.55 USBC1.B7
  Bottom Layer w20: v4(1915,3675) 1915,3536.01 1924,3527.01 1924,2906 2020,2810 2234.01,2810 2239.01,2815 2471.91,2815
PGND: C2.1 C5.1 C6.2 C14.2 U1.8 U1.13 U2.1 U3.1 | length 9583.2
  Top Layer w10: C5.1 C5.1@1442.51,2345.07
  Top Layer w20: U1.13 2043.28,314.41 v1(2049.14,320.27) 2055,326.13 2055,433.28 2043.28,445 1898.15,445 1890.94,452.2 U1.8 ; C5.1@1442.51,2345.07 U2.1 ; v1@2065,2350 2136.54,2421.54 2725,2421.54 ; v1(2320.27,320.27) 2320.27,805.82 C14.2 ; C6.2 3321.88,2455 3331.88,2445 v1(3340,2445)
  Bottom Layer w20: v1(2060,2340) 2057.5,2342.5 1527.5,2342.5 v1(1525,2345) 1525,1090 1626.54,988.46 1626.54,953.46 U3.1 1650,585 1695,540 1980,540 2055,465 2055,363.43 2054.88,363.31 2054.88,326.01 v1(2049.14,320.27) v1(2320.27,320.27) 2729.73,320.27 2805,245 3180,245 3375,440 3375,1893.44 3342.52,1925.92 3342.52,2073.43 3357.52,2088.43 3357.52,2121.57 3340,2139.09 v1(3340,2445)
VBUS1: C12.1 C16.1 pad.4@1080,3330 R17.2 R19.2 R20.2 RED1.1 U6.5 USBC1.A4 USBC1.A9 USBC1.B4 USBC1.B9 | length 140.9
  Top Layer w20: RED1.1 RED1.1@1411.53,3596.53 ; C12.1@2432.56,3485 2556.02,3485 2561.02,3490 U6.5
  other v1: 2235,3430 2115,3485 2340,3490 1435,3515 1580,3550 2225,3570
pads on no net: H1.1 H1.2 SW1.7 SW1.8 U1.1 U1.2 U1.9 U1.10 U2.4 U2.5 U2.14 U2.15 U2.16 U2.17 U2.18 U2.19 U2.20 U2.21 U2.22 U2.23 U2.24 U2.26 U2.32 U2.38 U2.39 U4.8 U7.2 U7.3 U7.4 U7.5 U7.9 U7.10 USBC1. USBC1.A8 USBC1.B5
copper on no net: | length 29864.6
  Top Layer w0.5: 409.18,3919.77 3527.83,3919.77 ; 19.35,409.18 ccw(c409.18,409.18) 409.18,19.35 ; 19.35,409.18 ccw(c409.18,409.18) 409.18,19.35 ; 19.35,409.18 19.35,3527.83 ; 19.35,409.18 19.35,3527.83 ; 19.35,3527.83 cw(c409.18,3527.83) 409.18,3917.66 ; 19.35,3527.83 cw(c409.18,3527.83) 409.18,3917.66 ; 409.18,19.35 3527.83,19.35 ; 409.18,19.35 3527.83,19.35 ; 409.18,3917.66 3527.83,3917.66 ; 3527.83,19.35 ccw(c3527.83,409.18) 3917.66,409.18 ; 3527.83,19.35 ccw(c3527.83,409.18) 3917.66,409.18 ; 3527.83,3917.66 cw(c3527.83,3527.83) 3917.66,3527.83 ; 3527.83,3917.66 cw(c3527.83,3527.83) 3917.66,3527.83 ; 3917.66,409.18 3917.66,3527.83 ; 3917.66,409.18 3917.66,3527.83
  Top Layer w20: v1(2035,2990) 2040.74,2984.26 2041.72,2984.26 v1@2041.72,2976.72
  other v1: 1970,2705
  other v2: 3125,1590 765,1595 765,3560 3125,3560
  other v3: 3540,390 395,395 390,3545 3545,3545

## Polygon pours and split planes (outlines as drawn)
GND on Top Layer "Top Layer-GND" (solid, remove dead copper, pour order 44): 409.18,19.35 cw(c409.18,409.18) 19.35,409.18 19.35,3527.83 cw(c409.18,3527.83) 409.18,3917.66 3527.83,3917.66 cw(c3527.83,3527.83) 3917.66,3527.83 3917.66,409.18 cw(c3527.83,409.18) 3527.83,19.35
3.3V on Top Layer "Top Layer-3.3V 1" (solid, pour order 43): 2745,1410 3355,1410 3360,1415 3360,1520 3445,1520 3460,1505 3460,1260 2745,1260
3.3V on Top Layer "Top Layer-3.3V" (solid, pour order 14): 2955,3130 3100,3130 3115,3115 3115,2780 3365,2780 3380,2765 3380,2540 3240,2540 3225,2525 3225,2430 3165,2430 3160,2425 2930,2655 1805,2655 1810,2660 1810,2950 1850,2950 1855,2955 1855,2845 1945,2755 2945,2755 2955,2765
GND on Top Layer "Top Layer-No Net 1" (solid, pour order 31): 1710,3835 1710,3620 1700,3610 1705,3605 1745,3605 1745,3685 1760,3700 2050,3700 2050,3620.43 2043.56,3614 2081,3614 2090,3605 2100,3615 2100,3845 2090,3835
NetJ2_1 on Top Layer "Top Layer-NetQ1_2" (solid, pour order 18): 560,2630 570,2620 570,2860 910,2860 920,2850 920,1860 875,1815 155,1815 145,1850 145,1875 145,2635 295,2635 300,2630
GND on Top Layer "Top Layer-No Net 2" (solid, pour order 29): 2540,3445 2540,3230 2460,3150 2460,3035 2400,2975 2160,2975 2160,2970 2160,2910 2155,2905 1870,2905 1870,3010 2000,3010 2015,3025 2015,3125 1835,3125 1830,3130 1830,3260 2070,3260 2075,3265 2380,3265 2380,3440 2375,3445
NetC10_2 on Top Layer "Top Layer-No Net 3" (solid, pour order 27): 3060,3350 3060,3200 3045,3185 3040,3190 2830,3190 2825,3195 2820,3190 2820,3040 2792.5,2942.5 2720,2940 2605,2940 2605,3190 2700,3285 2700,3340 2785,3340 2795,3350
VBUS1 on Top Layer "Top Layer-No Net 4" (solid, pour order 25): 1985,3625 1985,3425 2005,3405 2005,3300 2035,3270 2360,3270 2360,3435 2365,3440 2360,3445 2360,3455 2460,3455 2465,3460 2465,3550 2483.28,3568.28 2550.36,3568.28 2555,3572.93 2555,3645 2130,3645 2105,3620 2105,3565 2005,3565 2005,3625
VBUS1 on Top Layer "Top Layer-VBUS1" (solid, pour order 2): 1815,3625 1820,3620 1820,3520 1830,3510 1845,3510 1845,3415 1850,3410 1845,3405 1365,3405 1335,3435 1335,3600 1350,3615 1630,3615 1635,3610 1700,3610 1700,3590 1730,3560 1795,3560 1795,3580 1790,3585
VBUS1 on Top Layer "Top Layer-VBUS1 1" (solid, pour order 16): 1355,3200 600,3200 530,3130 530,2890 525,2885 525,2825 515,2815 130,2815 130,3295 255,3420 940,3420 955,3435 950,3440 950,3610 1355,3610
PGND on Bottom Layer "Bottom Layer-PGND" (solid, remove dead copper, pour order 45): 409.18,14.33 cw(c409.18,409.18) 14.33,409.18 cw(c19.35,409.18) 14.33,409.21 14.33,3527.83 cw(c409.18,3527.83) 409.18,3922.68 cw(c409.18,3917.66) 409.21,3922.68 3527.83,3922.68 cw(c3527.83,3527.83) 3922.68,3527.83 cw(c3917.66,3527.83) 3922.68,3527.8 3922.68,409.18 ccw(c3917.66,409.18) 3922.68,409.21 3922.68,409.18 cw(c3527.83,409.18) 3527.83,14.33 cw(c3527.83,19.35) 3527.8,14.33
3.3V on Bottom Layer "Bottom Layer-3.3V" (solid, pour order 41): 3320,2535 3385,2470 3455,2470 3455,1450 3415,1410 3415,1300 3595,1300 3600,1305 3595,1310 3595,2750 3565,2780 3320,2780
VBUS1 on Bottom Layer "Bottom Layer-VBUS1" (solid, pour order 19): 1650,3560 1630,3540 1630,3360 1310,3360 1260,3410 1260,3700 1245,3715 1285,3755 2400,3755 2490,3665 2490,3345 2120,3345 2120,3685 2110,3695 1640,3695 1625,3680 1625,3545

## Other copper
Top Layer:
  pour cut-out: 2826.49,3181.08 2825.41,3181.08 2825.41,3165.75 2827.76,3165.75 2827.76,3124.25 2849.25,3124.25 2849.25,3165.75 2850,3166.5 2850,3185 2830.41,3185
  pour cut-out: 1928.88,3694.59 1928.88,3691.1 1927.37,3689.59 1928.26,3688.7 1928.7,3688.7 1928.7,3680.67 1934.37,3675 1933.55,3674.18 1933.55,3669.77 1939.65,3663.67 1939.65,3629 1981.58,3629 1983,3630.41 2012.58,3630.41 2016.22,3626.77 2021.58,3626.77 2024.1,3629.29 2038.87,3629.29 2043.19,3633.6 2047.88,3633.6 2049.04,3634.77 2049.04,3644.96 2049.47,3645.39 2048.99,3645.39 2044.59,3649.79 2044.59,3694.59
  pour cut-out: 1758.78,3629.67 1758.16,3630.29 1753.24,3630.29 1753.24,3679.93 1750.41,3682.76 1762.24,3694.59 1901.12,3694.59 1902.63,3693.07 1902.63,3687.05 1879.8,3664.22 1879.8,3629 1879.8,3628.99 1759.45,3628.99 1758.16,3630.29 1753.24,3630.29
  pour cut-out: 3737.79,1283.46 3740,1281.25 3740,1170 3675.47,1170 3665.39,1180.08 3680.32,1195 3680.32,1200.76 3684.39,1204.84 3684.39,1228.77 3682.4,1230.77 3735.09,1283.46
  pour cut-out: 3735.09,1521.54 3737.79,1521.54 3740,1523.75 3740,1855 3665,1855 3665.29,1854.71 3665.29,1591.33 3735.09,1521.54 3737,1523.46 3739.71,1523.46
  pour cut-out: 1520,2310 1418.6,2310 1412.52,2303.92 1412.52,2326.36 1418.88,2320 1462.05,2320 1468.41,2326.36 1496.37,2326.36 1500,2330
  pour cut-out: 2366.17,1879.78 2438.74,1879.78 2441.5,1877.03 2441.5,1715.41 2437.49,1715.41 2436.5,1714.42 2431.4,1719.52 2431.4,1721.4 2429.94,1721.4 2422.11,1729.23 2411.03,1729.23 2410,1730.26 2408.97,1729.23 2397.89,1729.23 2383.8,1715.13 2383.8,1711.86 2381.49,1709.55 2369.71,1709.55 2366.17,1713.09 2366.21,1713.13 2366.21,1779.74 2383.63,1779.74 2387.75,1775.63 2400.94,1775.63 2406.61,1781.3 2408.7,1781.3 2408.7,1783.39 2414.37,1789.06 2414.37,1800.94 2408.7,1806.61 2408.7,1808.7 2406.61,1808.7 2402.41,1812.9 2387.59,1812.9 2385.02,1810.33 2369.71,1810.33 2366.17,1813.87
  pour cut-out: 1560,2925 1655,2925 1660,2920 1610,2920 1610,2880 1595,2880 1555,2920
  pour cut-out: 2554.58,3543.23 2550.36,3547.46 2550.36,3589.1 2550.36,3589.25 2473.5,3589.25 2468.05,3594.71 2447.85,3574.51 2447.85,3507.72 2453.3,3507.72 2453.3,3500.29 2545.19,3500.29 2550.73,3505.83 2594.56,3505.83 2594.56,3511.57 2545.19,3511.57 2545.19,3543.23
  pour cut-out: 1988.45,840.29 2013.67,840.29 2479.71,1306.34 2479.71,1913.67 2463.59,1929.78 2366.17,1929.78 2366.17,1913.91 2369.71,1910.37 2451.41,1910.37 2455.89,1905.89 2455.89,1904.25 2470.92,1889.21 2470.92,1325.94 2468.6,1325.94 1987.96,845.29
  pour cut-out: 1506.55,840.29 1506.55,844.8 1507.05,845.29 1460.3,892.04 1440.45,892.04 1412.53,919.96 1412.53,940.04 1387.47,940.04 1384.31,936.88 1384.31,912.32 1456.33,840.29 1506.55,840.29 1507.05,840.79 1507.05,845.29
  pour cut-out: 2369.71,2260.37 2366.17,2263.91 2366.17,2279.78 2367.34,2280.95 2715.95,2280.95 2781.34,2346.34 2781.34,2349.71 3006.25,2349.71 3006.8,2349.16 3010.51,2352.88 3012.36,2352.88 3012.36,2325.27 3005.49,2332.14 2947.14,2332.14 2944.13,2329.13 2782.5,2329.13 2713.74,2260.37 2369.71,2260.37 2369.71,2276.25 2366.17,2279.78
  pour cut-out: 2369.71,2157.83 2366.17,2161.37 2366.17,2174.76 2373.39,2181.98 2439.23,2181.98 2451.2,2170 2455,2170 2458.02,2166.98 2458.02,2158.02 2435.77,2158.02 2430.25,2163.55 2416.7,2150 2377.54,2150 2369.71,2157.83 2369.71,2171.23 2366.17,2174.76
  pour cut-out: 1825,3570 1860,3570 1860,3515 1870,3505 1880,3505 1890,3495 1905,3495 1915,3505 1915,3515 1920,3520 1920,3570 1940,3570 1940,3340 1925,3340 1925,3275 1920,3270 1915,3270 1915,3340 1910,3340 1915,3345 1915,3455 1850,3455 1850,3515 1840,3515 1835,3520 1830,3520 1825,3525
  pour cut-out: 1660,2060 1660,2080 1695,2080 1695,2075 1700,2070 1745,2070 1745,2050 1735,2050 1730,2055 1715,2055 1710,2050 1705,2050 1705,2055 1700,2060
  pour cut-out: 1580,2280 1465,2280 1465,2275.38 1468.18,2272.2 1460.98,2265 1450,2265 1450,2035 1455,2030 1455,2025 1470,2010 1470,2005 1475,2000 1480,2000 1495,2015 1580,2015
  pour cut-out: 3655,1560 3635,1580 3635,1770 3630,1765 3575,1765 3580,1760 3580,1600 3625,1555 3625,1550 3635,1550 3645,1560 3650,1560 3655,1555
  pour cut-out: 2035,355 2040,360 2040,350 2035,350 2030,345 2025,345 2025,330 1860,330 1860,335 1865,340 1877.68,340 1900.24,362.56 1972.56,362.56 1980,370 1990,360 2000,360 2010,350 2035,350 2040,355
  pour cut-out: 1180,580 1180,585 1145,620 1145,1365 1585,1805 1585,1820 1575,1820 1130,1375 1130,585 1135,580 1135,575 1175,575
  pour cut-out: 1200,525 1200,550 1115,550 1105,560 1105,565 1100,570 1100,1390 1560,1850 1580,1850 1580,1875 1585,1880 1580,1885 1565,1885 1075,1395 1070,1395 1075,1390 1075,530 1080,525
  pour cut-out: 1060,495 1045,495 1020,520 1020,1415 1535,1930 1580,1930 1580,1910 1550,1910 1045,1405 1045,535 1050,530 1050,515 1055,510 1055,505 1060,500
  pour cut-out: 1325,430 1330,425 1320,415 1320,405 1325,405 1325,385 1320,385 1320,375 1325,370 1330,370 1325,365 1325,355 1845,355 1845,363.21 1880,398.21 1880,410 1920,410 1920,405 1925,400 2015,400 2025,410 2030,405 2040,405 2040,425 2035,430 1925,430 1920,425 1876.44,425 1866.44,435 1330,435
  pour cut-out: 1200,405 1205,410 1205,415 1200,420 1200,435 1205,440 1205,465 1200,470 1030,470 990,510 990,1430 1520,1960 1570,1960 1585,1975 1585,1980 1495,1980 960,1445 960,440 1015,385 1205,385 1205,390 1200,395
Bottom Layer:
  pour cut-out: 1704.87,2067.34 1703.41,2068.8 1735.17,2068.8 1746.08,2079.71 1788.67,2079.71 2694.28,1174.1 2694.28,710.85 2691.29,710.85 2668.79,688.35 2668.79,658.49 2694.64,632.64 2709.57,632.64 2720.13,622.08 2720.13,614.39 2693.25,614.39 2670.18,591.32 2670.18,564.44 2680.73,553.89 2680.73,546.16 2688.46,546.16 2699.01,535.61 2708.18,535.61 2709.57,534.22 2709.57,517.35 2706.07,513.85 2693.92,513.85 2660.29,547.47 2660.29,1184.71 1815.87,2029.13 1780.87,2029.13 1775,2035 1761.04,2035 1756.33,2030.29 1735.42,2051.2 1704.87,2051.2
  pour cut-out: 2034.71,402.69 2036.92,404.9 2039.71,404.9 2039.71,458.67 1973.67,524.71 1695,524.71 1690,519.71 1690,505 1690.87,504.13 1950.85,504.13 2024.17,430.81 2025.81,430.81 2025.81,424.48 2030.29,420 2030.29,406.08 2033.68,402.69 2037.5,402.69 2039.71,404.9 2039.71,458.67
  pour cut-out: 1910.29,2886.33 1910.29,2891.01 1913.22,2891.01 1915.29,2893.08 2013.67,2794.71 2020,2794.71 2021.16,2795.87 2241.51,2795.87 2245.55,2799.91 2501.49,2799.91 2506.79,2794.61 2506.79,2776.55 2447.08,2776.55 2443.34,2780.29 2016.33,2780.29 1910.29,2886.33 1915.29,2891.33 1915.29,2893.08

## Silkscreen, mask and mechanical layers (free items; w line width, h text height)
Top Overlay:
  drawing of 2254 lines, arcs and shapes, not listed
  text "VBUS" at 1145,3310 h30
  text "GND" at 1485,3225 h30
Mechanical 1:
  circle w0.5: c393.7,393.7 r78.74
  circle w0.5: c3543.31,393.7 r78.74
  circle w0.5: c3543.31,3543.31 r78.74
  circle w0.5: c393.7,3543.31 r78.74
  circle w0.5: c766.68,1593.1 r118.06
  circle w0.5: c3124.47,1593.1 r118.11
  circle w0.5: c3124.47,3559.46 r119.66
  circle w0.5: c766.68,3559.46 r118.11
  circle w0.5: c393.7,393.7 r78.74
  circle w0.5: c3543.31,393.7 r78.74
  circle w0.5: c3543.31,3543.31 r78.74
  circle w0.5: c393.7,3543.31 r78.74
  lines w0.5: 648.57,3559.46 766.68,3559.46 766.68,3677.57 ; 3124.47,1474.99 3124.47,1593.1 3242.58,1593.1 ; 3124.47,3677.57 3124.47,3559.46 3242.58,3559.46
  lines w10: 19.35,3527.83 cw(c409.18,3527.83) 409.18,3917.66 ; 19.35,3527.83 19.35,3527.83 ; 19.35,3527.83 19.35,409.18 ccw(c409.18,409.18) 409.18,19.35 ; 409.18,19.35 409.18,19.35 ; 409.18,19.35 3527.83,19.35 ; 409.18,3917.66 3527.83,3917.66 ; 409.18,3917.66 409.18,3917.66 ; 3527.83,19.35 ccw(c3527.83,409.18) 3917.66,409.18 ; 3527.83,19.35 3527.83,19.35 ; 3527.83,3917.66 cw(c3527.83,3527.83) 3917.66,3527.83 ; 3527.83,3917.66 3527.83,3917.66 ; 3917.66,409.18 3917.66,409.18 ; 3917.66,409.18 3917.66,3527.83 ; 3917.66,3527.83 3917.66,3527.83

## Text inside footprints (layer, text, board x,y; h text height)
BEEP1: Top Overlay "+" at 3557.82,1207.68 h30 r225
D2: Top Overlay "D1" at 3758.98,2056.56 h30
U1: Top Overlay "13" at 1305,289.76 h30 r179; Top Overlay "1" at 1295,709.76 h30